# Altium PCB PCB3.PcbDoc (part 1 of 2)
Units mm, origin at the board's own origin, x right, y up, seen from the top; angles counter-clockwise.
Board outline 85.9 x 184.4 mm, 4 copper layers (Top Layer, GND, VCC, Bottom Layer), stack 1.615 mm thick; 137 components, 108 nets, 438 pads, 251 vias.
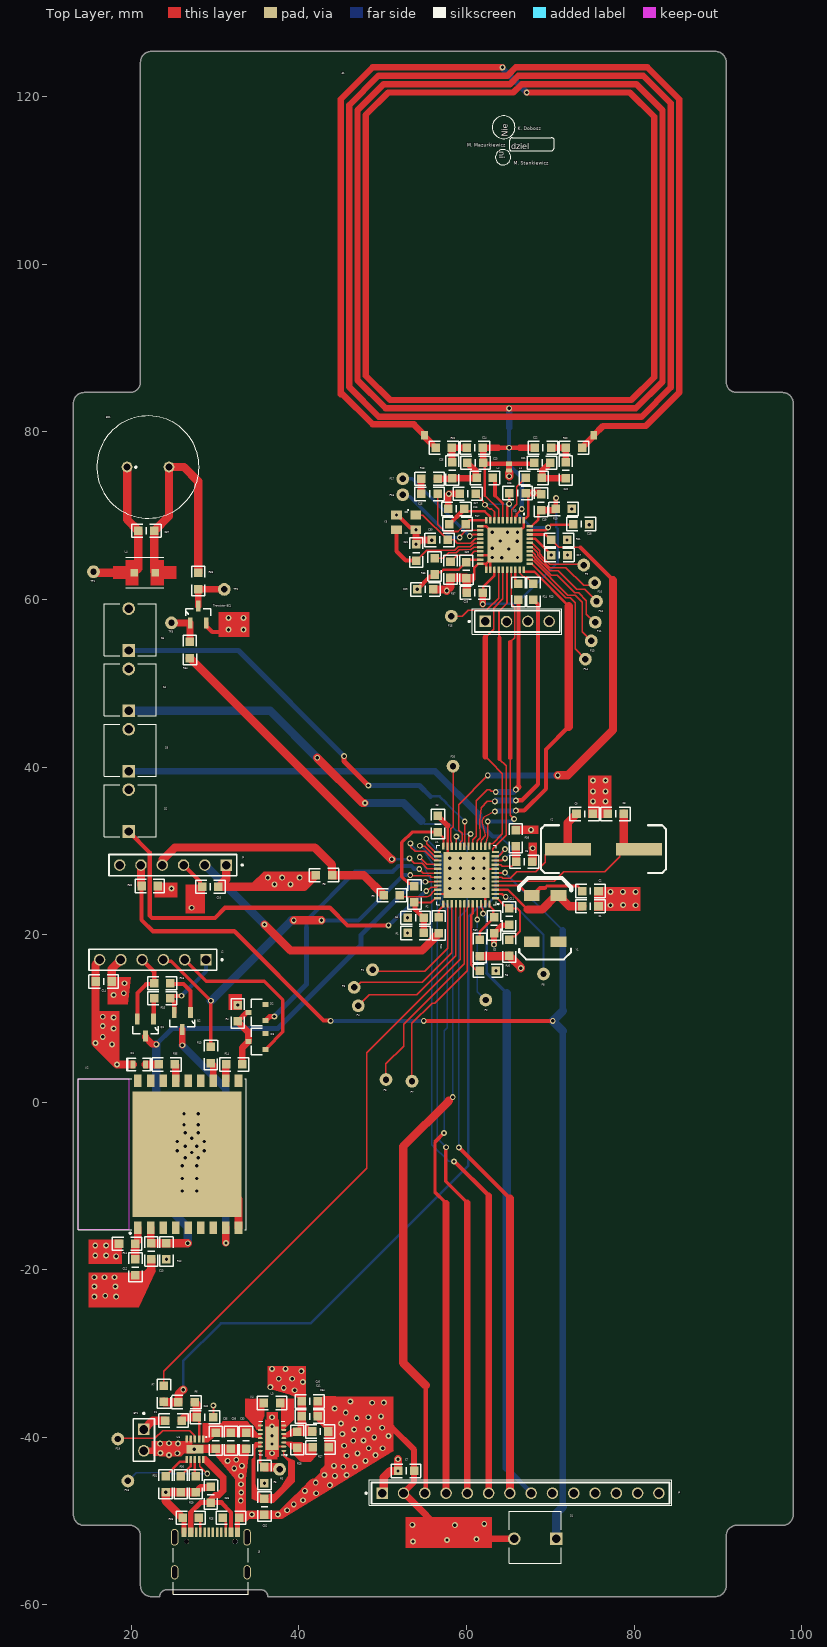
[diagram p0: Top Layer view]
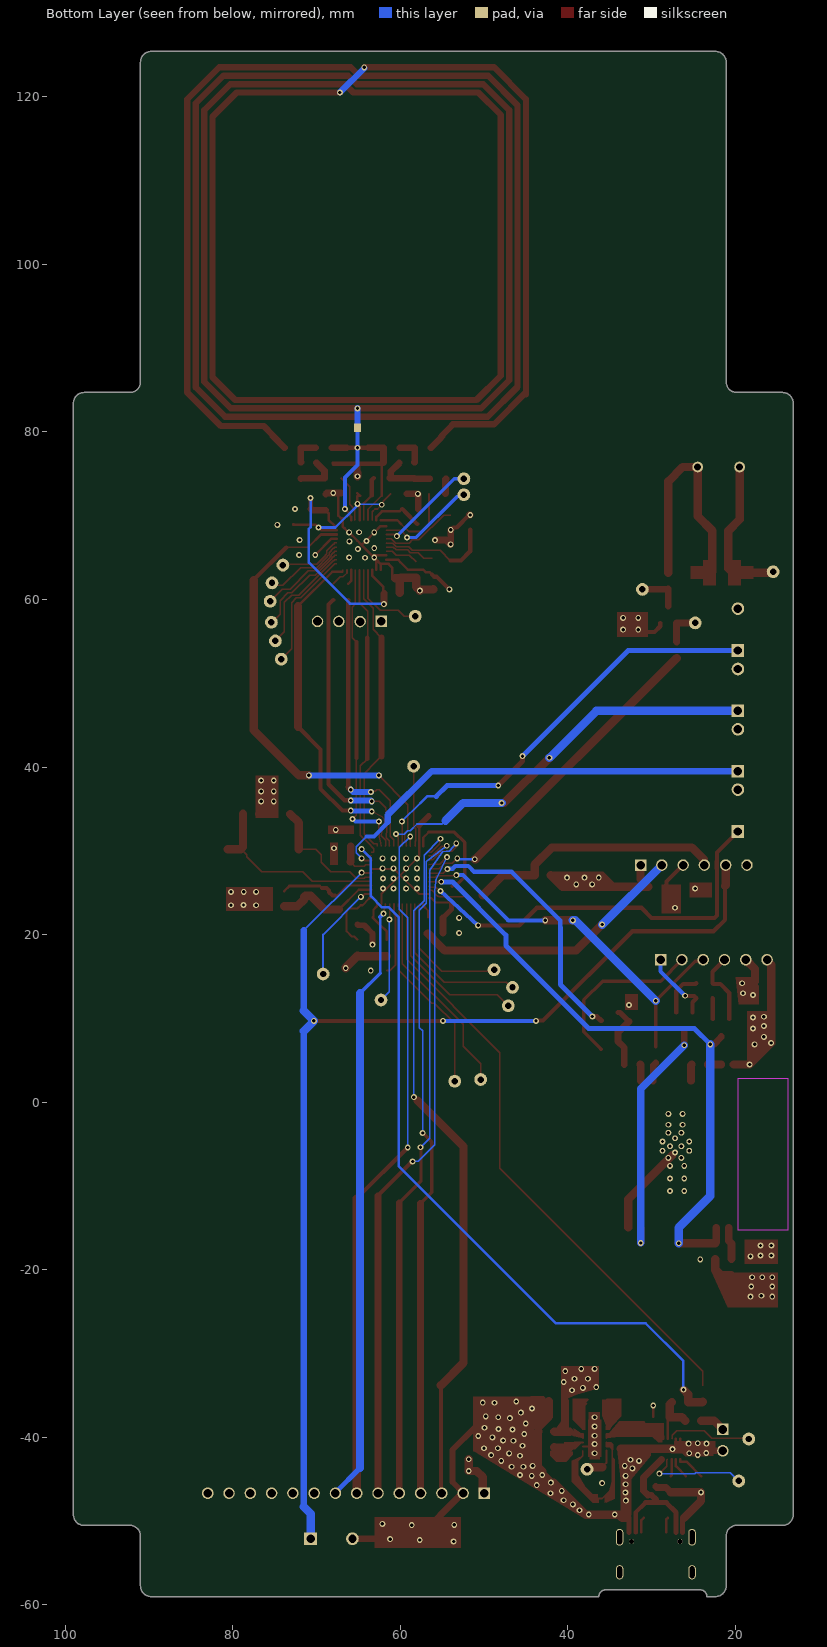
[diagram p1: Bottom Layer view, seen from below]
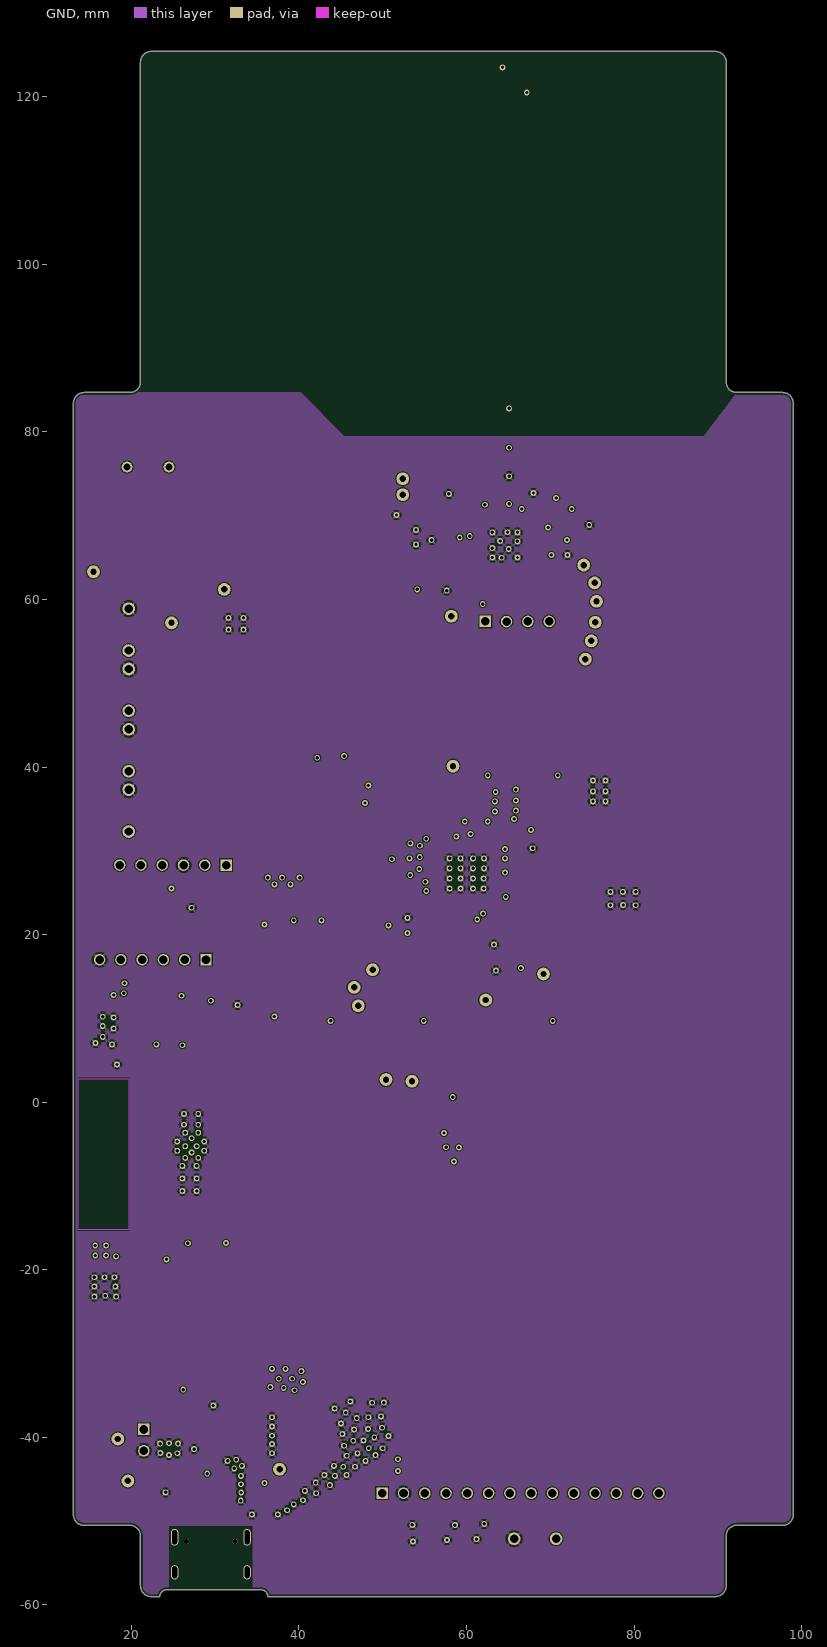
[diagram p2: GND]
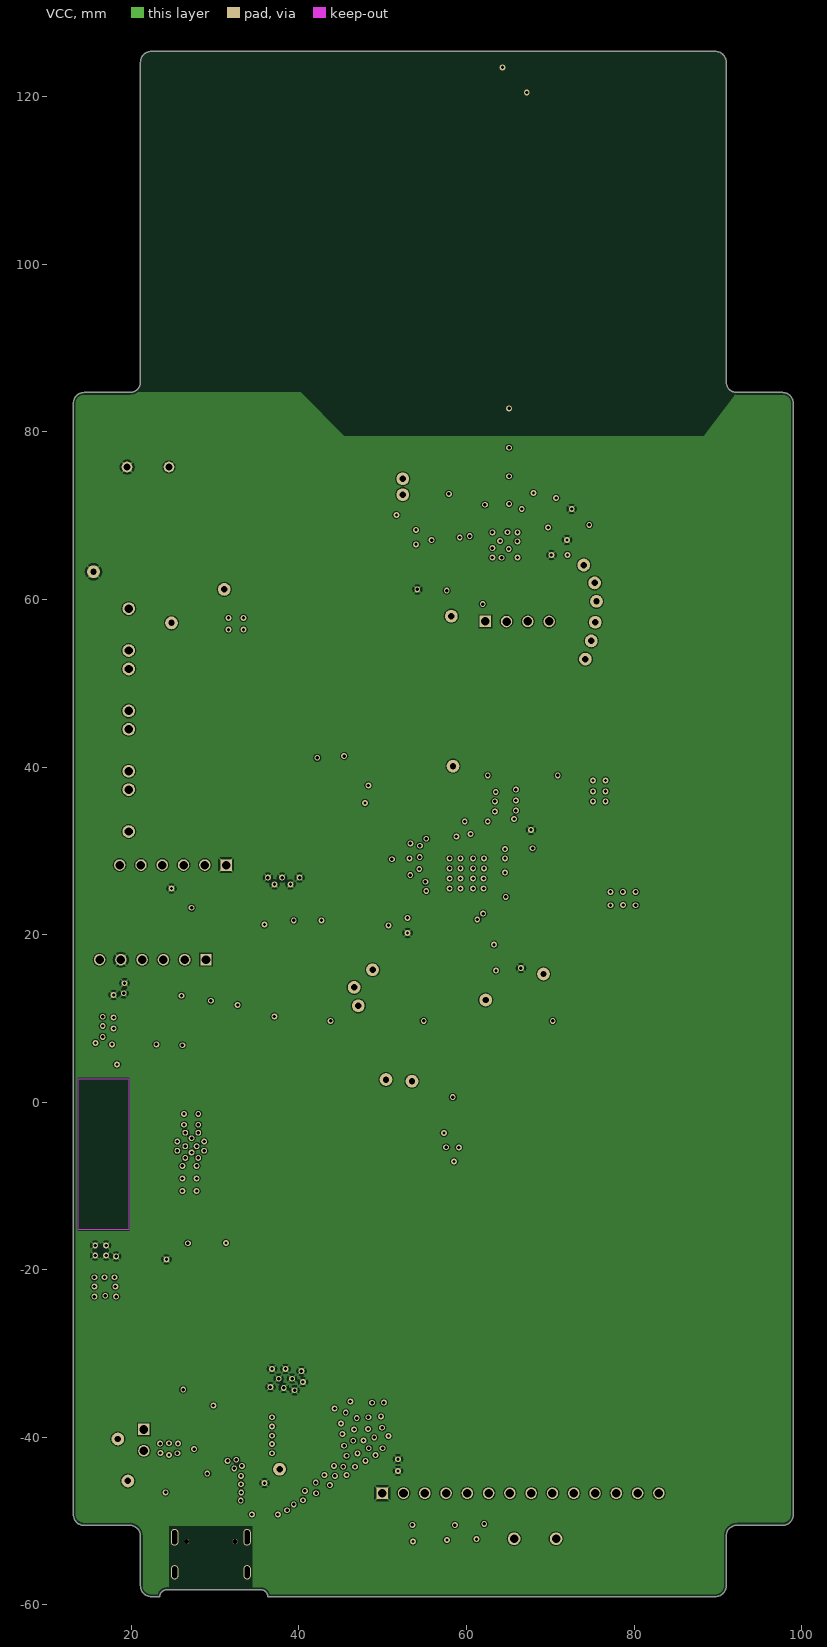
[diagram p3: VCC]
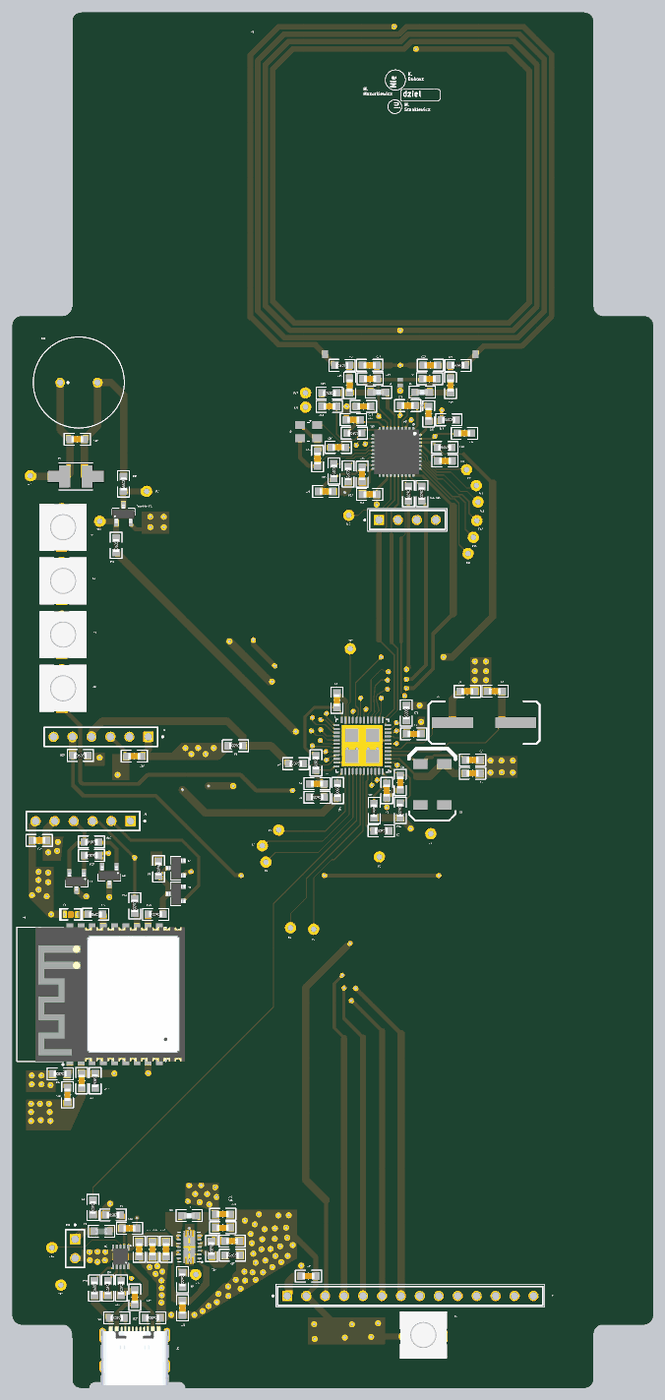
[diagram p5: 3D render of the assembled board from above, using the file's embedded part models]

## Layer stack, top to bottom
Top Solder: solder mask 0.0102, Solder Resist, Dk 3.5
Top Layer: signal copper 0.0175
Prepeg_Top1: prepreg 0.2, Dk 4.5
Prepeg_Top2: prepreg 0.2, Dk 4.5
GND: signal copper 0.035
Core Dielectric: core 0.71, FR4, Dk 4.8
VCC: signal copper 0.035
Prepeg_Bottom1: prepreg 0.2, Dk 4.5
Prepeg_Bottom2: prepreg 0.2, Dk 4.5
Bottom Layer: signal copper 0.0175
Bottom Solder: solder mask 0.0102, Solder Resist, Dk 3.5

## Board outline
13.1,-49.23 ccw(c14.37,-49.23) 14.37,-50.5 19.83,-50.5 cw(c19.83,-51.77) 21.1,-51.77 21.1,-57.73 ccw(c22.37,-57.73) 22.37,-59 23.4,-59 cw(c24.2,-59) 24.2,-58.2 35.5,-58.2 cw(c35.5,-59) 36.3,-59 89.73,-59 ccw(c89.73,-57.73) 91,-57.73 91,-51.77 cw(c92.27,-51.77) 92.27,-50.5 97.73,-50.5 ccw(c97.73,-49.23) 99,-49.23 99,83.43 ccw(c97.73,83.43) 97.73,84.7 92.27,84.7 cw(c92.27,85.97) 91,85.97 91,124.13 ccw(c89.73,124.13) 89.73,125.4 83.996,125.4 25,125.4 22.37,125.4 ccw(c22.37,124.13) 21.1,124.13 21.1,123 21.1,85.97 cw(c19.83,85.97) 19.83,84.7 14.37,84.7 ccw(c14.37,83.43) 13.1,83.43

## Design rules (kind name [scope] priority, off if disabled: settings)
BoardOutlineClearance [All] p1: gap=0.3 ignorepadtopadclearanceinfootprint=FALSE
Clearance [All] p1: gap=0.12 ignorepadtopadclearanceinfootprint=FALSE except(0: Track-Hole SMDPad-Hole THPad-Hole Via-Hole Fill-Hole Poly-Hole Region-Hole Text-Hole; 0.15: Arc-Arc Arc-Track Arc-SMDPad Arc-THPad Arc-Via Arc-Fill Arc-Poly Arc-Region Arc-Text Arc-Hole; 0.25: Track-Via Track-Fill Track-Poly Track-Region Track-Text)
ComponentClearance display_exeption [All vs InComponent('J4')] p1: gap=0 collisioncheckmode=3 verticalgap=0 showdistances=FALSE
ComponentClearance ComponentClearance_1 [All] p2: gap=0.254 collisioncheckmode=3 verticalgap=0.254 showdistances=FALSE
HoleSize [All] p1: absolutevalues=TRUE maxlimit=6 minlimit=0.3 maxpercent=80.000 minpercent=20.000
HoleToHoleClearance [All] p1: gap=0.52 allowstackedmicrovias=TRUE
MinimumAnnularRing [All] p1: minimumring=0.15
MinimumSolderMaskSliver [All] p1: minsoldermaskwidth=0.1
PlaneClearance [All] p1: clearance=0.25
PlaneConnect [All] p1: planeconnectstyle=Relief reliefexpansion=0.2 reliefentries=4 reliefconductorwidth=0.25 reliefairgap=0.2
PolygonConnect PolygonConnect_1 [IsPolygon vs IsVia] p1 off: connectstyle=Direct reliefconductorwidth=0.254 reliefentries=4 polygonreliefangle="90 Angle" airgapwidth=0.254
PolygonConnect [All] p2: connectstyle=Relief reliefconductorwidth=0.254 reliefentries=4 polygonreliefangle="45 Angle" airgapwidth=0.254
RoutingVias [All] p1: holewidth=0.35 width=0.75 viastyle="Through Hole" minholewidth=0.3 minwidth=0.7 maxholewidth=0.5 maxwidth=0.9
SilkToSilkClearance [All] p1: silktosilkclearance=0.12
SilkToSolderMaskClearance [IsPad] p1: minsilkscreentomaskgap=0.06 clearancetoexposedcopper=TRUE
SolderMaskExpansion [All] p1: expansion=0.05 istentingtop=FALSE
Width [All] p1: maxlimit=1.5 minlimit=0.12 preferedwidth=0.15
22 further rules are at their usual default settings.

## Classes and differential pairs
component class U_Zasilanie: BT1 C32 C33 C34 C35 C36 C38 C40 C41 C42 F1 J3 L3 P5 P18 P19 R5 R6 R7 R25 R26 R27 R28 R29 R30 R31 U4 U5
component class U_Wyswietlacz: C7 J4
component class U_STM-main: C1 C2 C3 C4 C5 C6 C8 C9 C10 C11 J1 P1 P2 P3 P4 P6 P7 P8 P20 R1 R2 R3 R8 R9 R10 R32 R38 R39 R40 U1 Y1 Y2
component class U_RFID: A1 C15 C16 C17 C18 C19 C20 C21 C22 C23 C24 C25 C26 C27 C28 C29 C30 C31 C39 L1 L2 P9 P10 P11 P12 P13 P14 P15 P16 P17 R17 R18 R19 R20 R21 R22 R23 R24 R36 R37 U3 Y3
component class U_ESP-WiFi: C12 C13 C14 D1 D2 D3 J2 Q1 Q2 R4 R11 R12 R13 R14 R15 R16 R35 U2
component class U_Buzzer: BZ1 C37 L4 R33 R34 TP1 TP2 TP3 "Transistor BC1"
component class U_Buttons: S1 S2 S3 S4 S5

## Components (designator, comment, footprint, x,y, rotation, side; value= is the part's Value field where it differs from the comment)
A1 "Antena" Antena_RFID 45,123.5 r270 top net-tie
BT1 "Bateria Li-Po" "LP623255 3,7V 1100mAh" 21.5,-40.3 r270 top net-tie
BZ1 "Buzzer" XDCR_PS1240P02BT 22,75.8 r0 top
C1 "20pF" 0603_CAP 74.8,23.4 r180 top
C2 "20pF" 0603_CAP 74.8,25.2 r180 top
C3 "100nF" 0603_CAP 56.6,33.2 r270 top
C4 "100nF" 0603_CAP 53.938,21.996 r0 top
C5 "100nF" 0603_CAP 63.3,21.1 r90 top
C6 "100nF" 0603_CAP 66.9,28.7 r180 top
C7 "100nF" 0603_CAP 52.8,-44 r180 top
C8 "32pF" 0603_CAP 77.8,34.4 r0 top
C9 "32pF" 0603_CAP 74.1,34.4 r180 top
C10 "100nF" 0603_CAP 29.438,25.696 r0 top
C11 "100nF" 0603_CAP 65.104,22.162 r90 top
C12 "100nF" 0603_CAP 20.5,-19.7 r90 top
C13 "100nF" 0603_CAP 22.4,-17.8 r90 top
C14 "100nF" 0603_CAP 16.7,14.4 r0 top
C15 "1nF" 0603_CAP 55.6,72.6 r180 top
C16 "100nF" 0603_CAP 58.8,70.8 r0 top
C17 "100nF" 0603_CAP 71.1,65.3 r180 top
C18 "100nF" 0603_CAP 73.7,69 r180 top
C19 "100nF" 0603_CAP 68.9,71.6 r270 top
C20 "22pF" 0603_CAP 71.838,75.4 r270 top
C21 "220pF" 0603_CAP 69.038,76.3 r0 top
C22 "200pF" 0603_CAP 69.138,78.1 r0 top
C23 "220pF" 0603_CAP 61.062,76.296 r0 top
C24 "200pF" 0603_CAP 61,78.1 r0 top
C25 "22pF" 0603_CAP 58.3,75.4 r270 top
C26 "100nF" 0603_CAP 66.1,72.704 r180 top
C27 "100nF" 0603_CAP 60.162,72.596 r0 top
C28 "100nF" 0603_CAP 61,60.8 r0 top
C29 "100nF" 0603_CAP 55.1,61.2 r180 top
C30 "16pF" 0603_CAP 56.8,67.1 r0 top
C31 "16pF" 0603_CAP 54,65.6 r270 top
C32 "100nF" 0603_CAP 35.904,-48.262 r90 top
C33 "10uF" 0603_CAP 33.7,-40.4 r90 top
C34 "22uF" 0603_CAP 42.562,-39.296 r180 top
C35 "100nF" 0603_CAP 30.1,-40.4 r90 top
C36 "100nF" 0603_CAP 29.496,-46.838 r270 top
C37 "1000nF" 0603_CAP 21.8,68.2 r180 top
C38 "10uF" 0603_CAP 31.9,-40.4 r90 top
C39 "100nF" 0603_CAP 60,63.5 r90 top
C40 "22uF" 0603_CAP 41.3,-35.7 r180 top
C41 "22uF" 0603_CAP 41.3,-37.5 r180 top
C42 "100nF" 0603_CAP 28.8,-37.6 r180 top
D1 "Value" 0603_LED_R_Reflow 20.95,4.5 r180 top
D2 "Value" SOT23-R 35,10.7 r90 top
D3 "Value" SOT23-R 35,7.25 r90 top
F1 "Bezpiecznik" 0603_FUSE 25.038,-38 r0 top
J1 "Pin Header STM" SAMTEC_TSW-112-16-T-S-06 17.35,28.3 r180 top
J2 "Pin Header ESP" SAMTEC_TSW-112-16-T-S-06 14.95,17 r180 top
J3 "Złącze USB-C" HRO_TYPE-C-31-M-12 29.5,-56.1 r0 top
J4 "Wyswietlacz" pin_header_LCD 35.19,-48.665 r0 top
L1 "560nH" 0603_IND 68.038,74.5 r0 top
L2 "560nH" 0603_IND 62.2,74.5 r180 top
L3 "1,5uH" 0603_IND 36.8,-35.9 r0 top
L4 "1500uH" IND_LQH43MN152K03L 21.6,63.2 r180 top
P1 "Pad" pad#1 48.8,15.8 r90 top
P2 "Pad" pad#1 62.3,12.2 r90 top
P3 "Pad" pad#1 46.6,13.7 r90 top
P4 "Pad" pad#1 47.1,11.5 r90 top
P5 "Pad" pad#1 37.7,-43.8 r270 top
P6 "Pad" pad#1 50.4,2.7 r90 top
P7 "Pad" pad#1 53.5,2.5 r90 top
P8 "Pad" pad#1 69.2,15.3 r90 top
P9 "Pad" pad#1 74,64.1 r90 top
P10 "Pad" pad#1 75.3,61.975 r180 top
P11 "Pad" pad#1 75.375,57.275 r90 top
P12 "Pad" pad#1 75.525,59.775 r180 top
P13 "Pad" pad#2 74.9,45.05 r180 top
P14 "Pad" pad#3 71.2,42.875 r180 top
P15 "Pad" pad#4 68.2,58 r180 top
P16 "Pad" pad#1 52.4,72.5 r180 top
P17 "Pad" pad#1 52.4,74.4 r180 top
P18 "Pad" pad#1 19.6,-45.2 r0 top
P19 "Pad" pad#1 18.4,-40.2 r0 top
P20 "Pad" pad#1 58.4,40.1 r180 top
Q1 "NPN" SOT95P240X110-3N 21.7,8.9 r270 top
Q2 "NPN" SOT95P240X110-3N 26.1,9.7 r270 top
R1 "0R" 0603_RES 53.938,20.2 r180 top
R2 "10R" 0603_RES 53.8,24.8 r270 top
R3 "0R" 0603_RES 62.562,15.7 r180 top
R4 "100k" 0603_RES 32.7,10.6 r270 top
R5 "10k" 0603_RES 35.9,-44.5 r270 top
R6 "100k" 0603_RES 26.6,-35.8 r0 top
R7 "100k" 0603_RES 23.9,-34.8 r270 top
R8 "10k" 0603_RES 43,27.1 r180 top
R9 "100R" 0603_RES 51.1,24.7 r180 top
R10 "100R" 0603_RES 56.7,21.1 r270 top
R11 "0R" 0603_RES 19.5,-16.9 r180 top
R12 "10k" 0603_RES 24.2,-17.8 r270 top
R13 "100R" 0603_RES 29.5,5.638 r270 top
R14 "100R" 0603_RES 32.3,4.5 r180 top
R15 "10k" 0603_RES 23.7,12.4 r180 top
R16 "10k" 0603_RES 23.7,14.2 r0 top
R17 "1k" 0603_RES 58.938,69 r0 top
R18 "2k7" 0603_RES 55.6,74.4 r0 top
R19 "0R" 0603_RES 71.6,70.8 r0 top
R20 "10R" 0603_RES 72.838,78.1 r180 top
R21 "10k" 0603_RES 71.062,67.1 r0 top
R22 "10R" 0603_RES 57.3,78.1 r0 top
R23 "100R" 0603_RES 68,60.9 r270 top
R24 "100R" 0603_RES 66.2,60.9 r270 top
R25 "5k1" 0603_RES 31.9,-49.6 r180 top
R26 "5k1" 0603_RES 27.1,-49.6 r180 top
R27 "100k" 0603_RES 42.6,-41.2 r0 top
R28 "560k" 0603_RES 39.8,-40.3 r270 top
R29 "2k4" 0603_RES 27.7,-45.6 r270 top
R30 "25k" 0603_RES 25.9,-45.6 r270 top
R31 "10k" 0603_RES 24.1,-45.6 r90 top
R32 "10k" 0603_RES 22.2,25.8 r0 top
R33 "Resistance" 0603_RES 28,62.2 r90 top
R34 "Resistance" 0603_RES 27,53.962 r90 top
R35 "100R" 0603_RES 24.238,4.5 r0 top
R36 "0R" 0603_RES 56.2,63.938 r90 top
R37 "0R" 0603_RES 58.1,63.538 r90 top
R38 "0R" 0603_RES 65.9,31.5 r90 top
R39 "0R" 0603_RES 61.6,18.4 r270 top
R40 "0R" 0603_RES 65.1,18.438 r270 top
S1 "RSTButton" SW_TL59NF160Q 68.2,-52.1 r180 top
S2 "Button1" SW_TL59NF160Q 19.7,34.8 r90 top
S3 "Button2" SW_TL59NF160Q 19.7,42 r90 top
S4 "Button3" SW_TL59NF160Q 19.7,49.2 r90 top
S5 "Button4" SW_TL59NF160Q 19.7,56.4 r90 top
TP1 "Test Point" pad#1 15.5,63.3 r0 top
TP2 "Test Point" pad#1 31.1,61.2 r90 top
TP3 "Test Point" pad#1 24.8,57.2 r90 top
"Transistor BC1" "NPN" SOT95P240X110-3N 28,58.2 r90 top
U1 "STM32L451CEU6" QFN50P700X700X60-49N 60,27.1 r180 top
U2 "ESP32-C3-WROOM-02-H4" MODULE_ESP32-C3-WROOM-02-H4 25.725,-6.235 r90 top
U3 "PN532" QFN40G-0.5-6X6MM 64.6,66.5 r270 top
U4 "TPS63020" IC_TPS63020DSJT 36.8,-40.1 r180 top
U5 "BQ25185" SON50P250X250X80-11N 27.6,-41.4 r270 top
Y1 "32,768kHz" "Q 0,032768-SMQ32SL-12,5-20-T1-LF" 69.4,21.9 r270 top
Y2 "8MHz" ATS080BSM-1E 76.35,30.2 r180 top
Y3 "27,12MHz" XTAL_ABM8-27.120MHZ-10-D1G-T 52.8,69.2 r270 top
? "GND-TVSS" GND-TVSS 65.1,75.8 r270 top net-tie

## Footprints (in the part's own frame and the unit in brackets; to place one, negate y for a bottom-side part, rotate by r counter-clockwise, add the part's x,y. Pads: shape width x height; smd on the part's side, far side on the other; paste and mask are expansions set on the pad)
0603_CAP [mil]
  rect 40x40 smd: 1(-37.89,0.14) 2(37.89,0.14)
  silkscreen extent -69,-31 69,32, body extent -31,-16 32,16, height 28
0603_FUSE [mil]
  rect 40x40 smd: 1(-37.89,0) 2(37.89,0)
  silkscreen extent -69,-31 69,31, body extent -31,-15 32,15, height 30
0603_IND [mil]
  rect 40x40 smd: 1(-37.89,0) 2(37.89,0)
  silkscreen extent -69,-31 69,31, body extent -31,-16 32,16, height 39
0603_LED_R_Reflow [mm]
  rect 0.6x0.9 smd paste-0.05: 1(-0.75,0) 2(0.75,0)
  silkscreen extent -1.35,-0.75 1.5,0.76, body extent -0.85,-0.45 0.85,0.45, height 0.9
0603_RES [mil]
  rect 40x40 smd: 1(-37.89,0) 2(37.89,0)
  silkscreen extent -69,-31 69,31, body extent -33,-17 33,15, height 22
Antena_RFID [mm]
  rect 1x0.8 smd: 1(43.9,30.2) 3(43.9,10)
  rect 1x0.8 smd far side: 2(43,20.1)
  Top Layer lines w0.75: 39,0 3.8,0 0,3.8 0,19.3 ; 38.8,0 42.6,3.8 42.6,8.7 cw(c42.7,8.7) 42.7,8.8 43.9,10 ; 3,22.2 3,34.5 5.9,37.4 36.975,37.4 39.7,34.675 39.7,30.8 39.7,9.6 39.7,5.9 36.8,3 5.675,3 3,5.675 3,20.6 2,21.6 2,21.9 2,35.3 5.1,38.4 37.525,38.4 40.7,35.225 40.7,5.8 40.7,5.35 37.35,2 5.1,2 2,5.1 2,19.5 2,19.9 2,20.2 1,21.2 1,23.1 1,36.1 4.3,39.4 38.2,39.4 41.7,35.9 41.7,4.55 38.15,1 5.1,1 4.5,1 1,4.5 1,17.6 1,19.9 0,20.9 0,22.7 0,36.6 3.8,40.4 38.8,40.4 42.8,36.4 42.8,31.3 43.9,30.2
  Bottom Layer lines w0.254: 0.1,19.3 0,19.3
  Bottom Layer lines w0.75: 0.1,19.3 3,22.2 ; 43,20.1 40.7,20.1
ATS080BSM-1E [mm]
  rect 5.5x1.5 smd: 1(-4.25,0) 2(4.25,0)
  silkscreen extent -7.45,-2.85 7.45,2.85, body extent -6.15,-2.41 6.15,2.42, height 4.3
GND-TVSS [mm]
  rect 0.5x0.7 smd mask-1: 1(-0.4,0) 2(0.4,0)
  Top Layer lines w0.7: 0.2,0 -0.2,0
HRO_TYPE-C-31-M-12 [mm]
  rect 0.6x1.14 smd mask+0.05: A1_B12(-3.2,4.75) A4_B9(-2.4,4.75) B1_A12(3.2,4.75) B4_A9(2.4,4.75)
  rect 0.3x1.14 smd mask+0.05: A5(-1.25,4.75) A6(-0.25,4.75) A7(0.25,4.75) A8(1.25,4.75) B5(1.75,4.75) B6(0.75,4.75) B7(-0.75,4.75) B8(-1.75,4.75)
  oval 0.9x2 hole 0.6 slot 1.7 at 90 deg: S1(-4.325,4.17) S2(4.325,4.17)
  oval 0.9x1.7 hole 0.6 slot 1.4 at 90 deg: S3(-4.325,0) S4(4.325,0)
  round 0.6 hole 0.6 unplated: ""(-2.89,3.68) ""(2.89,3.68)
  silkscreen extent -4.47,-2.6 4.47,2.85, body extent -4.47,-2.6 4.47,5.31, height 3.31
IC_TPS63020DSJT [mm]
  oval 0.6x0.24 smd mask+0: 1(-1.4,1.5) 2(-1.4,1) 3(-1.4,0.5) 4(-1.4,0) 5(-1.4,-0.5) 6(-1.4,-1) 7(-1.4,-1.5) 8(1.4,-1.5) 9(1.4,-1) 10(1.4,-0.5) 11(1.4,0) 12(1.4,0.5) 13(1.4,1) 14(1.4,1.5)
  rect 1.5x2.8 smd paste-2 mask+0: 15(0,0)
  Top Layer region: 0.79,-2.2 0.59,-2.2 0.59,-1.425 0.33,-1.425 0.33,-2.2 0.13,-2.2 0.13,-1.425 -0.13,-1.425 -0.13,-2.2 -0.33,-2.2 -0.33,-1.425 -0.59,-1.425 -0.59,-2.2 -0.79,-2.2 -0.79,2.2 -0.59,2.2 -0.59,1.425 -0.33,1.425 -0.33,2.2 -0.13,2.2 -0.13,1.425 0.13,1.425 0.13,2.2 0.33,2.2 0.33,1.425 0.59,1.425 0.59,2.2 0.79,2.2
  silkscreen extent -1.78,-2 1.5,2.07
IND_LQH43MN152K03L [mm]
  rect 0.9x0.9 smd paste-1 mask+0: 1(-1.25,0) 2(1.25,0)
  Top Layer region: -0.75,-1.5 -2.25,-1.5 -2.25,-0.75 -3.75,-0.75 -3.75,0.75 -2.25,0.75 -2.25,1.5 -0.75,1.5
  Top Layer region: 2.25,0.75 3.75,0.75 3.75,-0.75 2.25,-0.75 2.25,-1.5 0.75,-1.5 0.75,1.5 2.25,1.5
  silkscreen extent -2.25,-1.82 2.25,1.82
"LP623255 3,7V 1100mAh" [mm]
  rect 1.37x1.37 hole 1.02: 1(-1.24,0)
  round 1.37 hole 1.02: 2(1.3,0)
  silkscreen extent -3.26,-1.27 2.57,1.27
MODULE_ESP32-C3-WROOM-02-H4 [mm]
  rect 1.5x0.9 smd: 1(-8.725,4.925) 2(-8.725,3.425) 3(-8.725,1.925) 4(-8.725,0.425) 5(-8.725,-1.075) 6(-8.725,-2.575) 7(-8.725,-4.075) 8(-8.725,-5.575) 9(-8.725,-7.075) 10(8.775,-7.075) 11(8.775,-5.575) 12(8.775,-4.075) 13(8.775,-2.575) 14(8.775,-1.075) 15(8.775,0.425) 16(8.775,1.925) 17(8.775,3.425) 18(8.775,4.925)
  rect 15x13 smd: 19(0.025,-0.95)
  round 0.7 hole 0.4 mask+0: 28(0.435,0.225) 29(1.535,0.225) 30(-0.415,-0.725) 31(0.985,-0.725) 32(2.585,-0.725) 33(0.235,-1.475) 34(1.935,-1.475) 35(-0.415,-2.275) 36(0.985,-2.075) 37(2.585,-2.275) 38(0.435,-2.975) 39(1.535,-2.975)
  Keep-Out Layer region: 9.025,6.025 -8.975,6.025 -8.975,12.025 9.025,12.025
  Keep-Out Layer region: 9.025,6.025 -8.975,6.025 -8.975,12.025 9.025,12.025
  silkscreen extent -9.5,-7.98 9.03,12.03, body extent -8.97,-10.48 9.03,9.53, height 3.35
pad#1 [mil]
  round 60 hole 30: 1(0,0)
pad#2 [mil]
  round 60 hole 30: 1(0,-393.7)
pad#3 [mil]
  round 60 hole 30: 1(-118.11,-393.7)
pad#4 [mil]
  round 60 hole 30: 1(393.7,0)
pin_header_LCD [mm]
  rect 1.37x1.37 hole 1.02: 1(14.76,2) 15(27.06,106.04)
  round 1.37 hole 1.02: 2(17.3,2) 3(19.84,2) 4(22.38,2) 5(24.92,2) 6(27.46,2) 7(30,2) 8(32.54,2) 9(35.08,2) 10(37.62,2) 11(40.16,2) 12(42.7,2) 13(45.24,2) 14(47.78,2) 16(29.6,106.025) 17(32.14,106.04) 18(34.68,106.04)
  silkscreen extent 12.74,0.73 49.05,107.31
"Q 0,032768-SMQ32SL-12,5-20-T1-LF" [mm]
  rect 1.3x1.9 smd: 1(-2.75,1.6) 2(2.75,1.6) 3(2.75,-1.6) 4(-2.75,-1.6)
  silkscreen extent -4.85,-3.13 4.85,3.1, body extent -4,-2 4,2, height 2.4
QFN40G-0.5-6X6MM [mm]
  rrect50% 0.8x0.3 smd: 1(-2.95,2.25) 2(-2.95,1.75) 3(-2.95,1.25) 4(-2.95,0.75) 5(-2.95,0.25) 6(-2.95,-0.25) 7(-2.95,-0.75) 8(-2.95,-1.25) 9(-2.95,-1.75) 10(-2.95,-2.25) 21(2.95,-2.25) 22(2.95,-1.75) 23(2.95,-1.25) 24(2.95,-0.75) 25(2.95,-0.25) 26(2.95,0.25) 27(2.95,0.75) 28(2.95,1.25) 29(2.95,1.75) 30(2.95,2.25)
  rrect50% 0.3x0.8 smd: 11(-2.25,-2.95) 12(-1.75,-2.95) 13(-1.25,-2.95) 14(-0.75,-2.95) 15(-0.25,-2.95) 16(0.25,-2.95) 17(0.75,-2.95) 18(1.25,-2.95) 19(1.75,-2.95) 20(2.25,-2.95) 31(2.25,2.95) 32(1.75,2.95) 33(1.25,2.95) 34(0.75,2.95) 35(0.25,2.95) 36(-0.25,2.95) 37(-0.75,2.95) 38(-1.25,2.95) 39(-1.75,2.95) 40(-2.25,2.95)
  rrect10% 4.2x4.2 smd: 41(0,0)
  silkscreen extent -3.78,2.19 -3.58,2.39, body extent -3,-3 3,3, height 1
QFN50P700X700X60-49N [mm]
  rrect25% 0.83x0.27 smd: 1(-3.45,2.75) 12(-3.45,-2.75) 25(3.45,-2.75) 36(3.45,2.75)
  rrect25% 0.87x0.27 smd: 2(-3.43,2.25) 3(-3.43,1.75) 4(-3.43,1.25) 5(-3.43,0.75) 6(-3.43,0.25) 7(-3.43,-0.25) 8(-3.43,-0.75) 9(-3.43,-1.25) 10(-3.43,-1.75) 11(-3.43,-2.25) 26(3.43,-2.25) 27(3.43,-1.75) 28(3.43,-1.25) 29(3.43,-0.75) 30(3.43,-0.25) 31(3.43,0.25) 32(3.43,0.75) 33(3.43,1.25) 34(3.43,1.75) 35(3.43,2.25)
  rrect25% 0.27x0.83 smd: 13(-2.75,-3.45) 24(2.75,-3.45) 37(2.75,3.45) 48(-2.75,3.45)
  rrect25% 0.27x0.87 smd: 14(-2.25,-3.43) 15(-1.75,-3.43) 16(-1.25,-3.43) 17(-0.75,-3.43) 18(-0.25,-3.43) 19(0.25,-3.43) 20(0.75,-3.43) 21(1.25,-3.43) 22(1.75,-3.43) 23(2.25,-3.43) 38(2.25,3.43) 39(1.75,3.43) 40(1.25,3.43) 41(0.75,3.43) 42(0.25,3.43) 43(-0.25,3.43) 44(-0.75,3.43) 45(-1.25,3.43) 46(-1.75,3.43) 47(-2.25,3.43)
  rect 5.5x5.5 smd paste-4: 49(0,0)
  silkscreen extent -3.85,-3.55 3.55,3.55
SAMTEC_TSW-112-16-T-S-06 [mm]
  rect 1.37x1.37 hole 1.02: 1(-13.97,0)
  round 1.37 hole 1.02: 2(-11.43,0) 3(-8.89,0) 4(-6.35,0) 5(-3.81,0) 6(-1.27,0)
  silkscreen extent -15.99,-1.27 0,1.27
SON50P250X250X80-11N [mm]
  rect 0.85x0.3 smd mask+0.05: 1(-1.225,1) 2(-1.225,0.5) 3(-1.225,0) 4(-1.225,-0.5) 5(-1.225,-1) 6(1.225,-1) 7(1.225,-0.5) 8(1.225,0) 9(1.225,0.5) 10(1.225,1)
  rect 1x2 smd paste-2 mask+0.05: 11(0,0)
  silkscreen extent -1.47,1.33 -1.43,1.37, body extent -1,-1.1 1,1.1, height 0.8
SOT23-R [mm]
  rect 0.6x0.7 smd: 1(-0.95,-1) 2(0.95,-1) 3(0,1)
  silkscreen extent -1.57,-0.65 1.57,0.66, body extent -1.52,-1.3 1.53,1.3, height 1.3
SOT95P240X110-3N [mil]
  rect 52x22 smd: 1(-40,38) 2(-40,-38) 3(40,0)
  silkscreen extent -6,-59 28,59, body extent -48,-59 48,59, height 44
SW_TL59NF160Q [mm]
  rect 1.508x1.508 / inner round 1.508 / far side rect 1.508x1.508 hole 1: 1(-2.5,0)
  round 1.508 hole 1: 2(2.5,0)
  silkscreen extent -3.1,-3.3 3.1,2.9, body extent -3.1,-3.3 3.1,2.9, height 4.3
XDCR_PS1240P02BT [mm]
  round 1.28 hole 0.85: 1(-2.5,0) 2(2.5,0)
  silkscreen extent -6.1,-6.1 6.1,6.1
XTAL_ABM8-27.120MHZ-10-D1G-T [mm]
  rect 1.05x1.3 smd: 1(-0.875,1.15) 2(-0.875,-1.15) 3(0.875,-1.15) 4(0.875,1.15)
  silkscreen extent -1.49,-0.18 1.25,0.27

## Part data
C1 C2 C3 C4 C5 C6 C7 C8 C9 C10 C11 C12 C13 C14 C15 C16 C17 C18 C19 C20 C21 C22 C23 C24 C25 C26 C27 C28 C29 C30 C31 C32 C33 C34 C35 C36 C37 C38 C39 C40 C41 C42: library part Cap, "Ceramic capacitor"
D1: library part LED_R_small
D2 D3: library part "D Schottky", "Schottky Diode"
J3: library part "Zlacze USB-C"
J4: library part "Pin Header Wyswietlacz"
L1 L2 L3 L4: library part Inductor, "Inductor"
Q1 Q2 "Transistor BC1": "NPN General-purpose Transistor"
R1 R2 R3 R4 R5 R6 R7 R8 R9 R10 R11 R12 R13 R14 R15 R16 R17 R18 R19 R20 R21 R22 R23 R24 R25 R26 R27 R28 R29 R30 R31 R32 R35 R36 R37 R38 R39 R40: library part RES, "Resistor"
R33: library part RES, "Resistor", Resistance=100R
R34: library part RES, "Resistor", Resistance=6k8
S1 S2 S3 S4 S5: library part Button
U2: "WiFi Modules (802.11) (Engineering Samples) SMD module, ESP32-C3, 4MB SPI flash, PCB antenna, -40 C +105 C", Package=Package, Availability="In Stock", Check_prices=https://www.snapeda.com/parts/ESP32-C3-WROOM-02-H4/Espressif+Systems/view-part/?ref=eda, MF="Espressif Systems", MP=ESP32-C3-WROOM-02-H4, Price=None, Purchase-URL=https://pricing.snapeda.com/search/part/ESP32-C3-WROOM-02-H4/?ref=eda, SnapEDA_Link=https://www.snapeda.com/parts/ESP32-C3-WROOM-02-H4/Espressif+Systems/view-part/?ref=snap
U4: library part "Stabilizator napięcia"
Y1: library part Oscylator4, PartNumber="Q 0,032768-SMQ32SL-12,5-20-T1-LF"
Y2: library part Oscylator, PartNumber=ATS080BSM-1E
Y3: library part Oscylator4, PartNumber=ABM8-27.120MHZ-10-D1G-T

## Via types
v1: diameter 0.7, hole 0.4, Top Layer to Bottom Layer, 186 vias
v2: diameter 0.7, hole 0.4, Top Layer to Bottom Layer, tented bottom, 64 vias
v3: diameter 0.7, hole 0.4, Top Layer to Bottom Layer, tented both sides, 1 vias

## Nets (pads, with @x,y where several pads share a name; then routed paths per layer and width w, separated by ;. In a path a pad name is that pad's centre, name@x,y a point inside that pad or via, vN(x,y) a via of type N, cw(c..) or ccw(c..) an arc to the next point about the centre after c; other vN are vias at no path point)
EN: C13.2 Q1.3 R12.1 U1.32 U2.2 | length 75.7
  Top Layer w0.15: v1(55.1,26.3) 55.125,26.325 56.545,26.325 U1.32@56.57,26.35
  Top Layer w0.8: Q1.3@21.7,7.884 21.7,7.744 22.544,6.9 v1(23,6.9)
  Top Layer w0.9: U2.2@22.3,-14.96 22.3,-16.741 C13.2@22.396,-16.838
  Top Layer w1: C13.2@22.396,-16.838 R12.1@24.2,-16.838 v1(26.762,-16.838)
  Bottom Layer w0.6: v1(23,6.9) 24.9,8.8 37.5,8.8 47.4,18.7 47.4,19.927 53.773,26.3 v1(55.1,26.3)
  Bottom Layer w1: v1(23,6.9) 23,-11.2 26.762,-14.962 v1(26.762,-16.838)
GND: "Transistor BC1.2" ?.2 BT1.2 C1.1 C2.1 C3.1 C4.1 C5.1 C6.1 C7.1 C8.1 C9.1 C10.1 C11.1 C12.1 C13.1 C14.1 C16.1 C17.1 C18.1 C19.1 C26.1 C27.1 C28.1 C29.1 C30.1 C31.1 C32.1 C33.1 C34.1 C35.1 C36.1 C38.1 C39.1 C40.1 C41.1 C42.1 D1.2 J1.3 J2.6 J3.A1_B12 J3.B1_A12 J4.2 R3.1 R4.1 R25.1 R26.2 R27.2 R29.2 R30.2 R31.1 R37.1 S1.2 S2.2 S3.2 S4.2 S5.2 U1.8 U1.23 U1.35 U1.47 U1.49 U2.9 U2.19 U2.28 U2.29 U2.30 U2.31 U2.32 U2.33 U2.34 U2.35 U2.36 U2.37 U2.38 U2.39 U3.1 U3.11 U3.18 U3.20 U3.21 U3.22 U3.41 U4.2 U4.15 U5.4 U5.5 U5.11 Y3.2 Y3.4 | length 194.1
  Top Layer w0.15: C42.1@29.762,-37.604 C42.1@29.8,-37.566
  Top Layer w0.25: C42.1@29.8,-37.566 v2(29.8,-36.2) ; v2(36.8,-39.8) U4.15@36.8,-40.1 v2(36.8,-40.8) 36.8,-40.9 37,-41.1 U4.2@38.2,-41.1 ; v2(36.8,-38.7) v2(36.8,-37.6) ; U1.35@56.57,24.85 57.75,24.85 U1.49@60,27.1 ; U1.49@57.75,29.35 U1.49@60,27.1 ; U1.47@62.25,23.67 62.25,24.85 U1.49@60,27.1 ; U1.8@63.43,27.85 60.75,27.85 U1.49@60,27.1
  Top Layer w0.3: U5.5@26.6,-40.175 26.6,-40.7 26.75,-40.85 26.75,-40.95 27.2,-41.4 v2(27.5,-41.4) ; U5.4@27.1,-40.175 27.1,-40.95 U5.11@27.525,-41.375 ; U1.49@57.75,29.35 U1.23@57.75,30.53 57.75,33.016 ; 60.962,62.538 60.962,63.803 U3.20@61.4,64.241 ; U3.20@61.4,64.25 U3.20@61.65,64.25 62.35,64.25 ; U3.18@61.65,65.25 U3.41@63.35,65.25 ; U3.11@61.65,68.75 62.35,68.75 v2(63.1,68) 63.1,67.975 64.05,67.025 U3.41@64.05,67 ; U3.21@62.35,63.55 62.35,64.25 ; U3.22@62.85,63.55 U3.41@62.85,64.75 ; v2(64.025,66.975) U3.41@64.05,67 ; C26.1@67.062,72.7 67.4,72.362 67.4,70 67.1,69.7 66.85,69.7 U3.1@66.85,69.45 66.85,68.659 66.674,68.484 66.616,68.484 66.132,68 v2(66.1,68) 65.1,67 U3.41@64.6,66.5 ; 62.35,64.25 U3.41@62.85,64.75 ; U3.41@62.85,64.75 v2(63.1,65) U3.41@63.35,65.25 ; U3.41@63.35,65.25 U3.41@64.6,66.5 ; U3.41@64.05,67 64.1,67 U3.41@64.6,66.5
  Top Layer w0.5: J1.3@26.24,28.3 28.217,26.323 28.217,25.958 C10.1@28.475,25.7 ; 28.965,57.184 28.965,56.803 29.668,56.1 30.5,56.1 ; Y3.2@51.775,70.075 53.25,68.6 53.675,68.6 Y3.4@53.95,68.325
  Top Layer w0.6: R26.2@26.138,-49.6 26.3,-49.762 J3.A1_B12@26.3,-51.35 ; J3.B1_A12@32.7,-51.35 32.7,-49.762 R25.1@32.862,-49.6 32.87,-49.592 32.953,-49.51 32.953,-47.672 33.125,-47.5 v1(33.125,-46.575) 33.1,-46.55 v1(33.1,-45.6) 33.081,-45.581 33.081,-44.619 v1(33.1,-44.6)
  Top Layer w0.7: S3.2@19.596,44.604 S3.2@19.7,44.5 ; v1(49.8,-37.5) 49.8,-37.693 50.95,-38.843 51.11,-38.843 53.762,-41.495 C7.1@53.762,-44.004 53.762,-45.338 J4.2@52.5,-46.6 ; C3.1@56.604,34.162 57.75,33.016 ; v1(63.3,18.8) 63.296,18.804 C5.1@63.296,20.138 64.281,21.123 65.023,21.123 C11.1@65.1,21.2 ; C6.1@67.862,28.696 67.862,30.262 v1(67.9,30.3)
  Top Layer w0.8: BT1.2@21.5,-41.6 v1@23.5,-41.6 ; v1(23.475,-41.875) 23.5,-41.9 24.2,-41.9 ; v1@24.3,-41.9 v1(24.5,-42.1) ; 24.3,-41.8 24.2,-41.9 ; v2(27.5,-41.4) 27.4,-41.5 26.252,-41.5 25.852,-41.9 v1(25.5,-41.9) 24.2,-41.9 ; R29.2@27.7,-46.562 28.279,-45.983 29.392,-45.983 C36.1@29.5,-45.875 ; v2(51.65,70.075) Y3.2@51.775,70.075 ; J4.2@52.5,-46.6 58,-52.1 S1.2@65.7,-52.1 ; Y3.4@53.95,68.325 v2(53.977,68.298) 53.977,66.589 C31.1@54.004,66.562 54.545,67.104 C30.1@55.838,67.104 ; C16.1@57.838,70.804 57.838,72.538 v1(57.9,72.6) C27.1@59.2,72.6 ; C26.1@67.062,72.7 68.766,72.7 C19.1@68.904,72.562
  Top Layer w1: J2.6@16.22,17 16.22,16.9 15.738,16.417 C14.1@15.738,14.404 v1(15.738,7.062) v1(18.3,4.5) D1.2@20.2,4.5 ; C12.1@20.496,-20.662 20.504,-20.654 21.746,-20.654 22.4,-20 22.4,-18.766 C13.1@22.396,-18.762 ; R26.2@26.138,-49.6 24.108,-47.57 24.108,-46.57 v2(24.1,-46.562) R30.2@25.9,-46.562 R29.2@27.7,-46.562 ; v2(27.5,-41.4) 27.525,-41.375 27.53,-41.37 30.088,-41.37 C35.1@30.096,-41.362 C38.1@31.896,-41.362 C33.1@33.696,-41.362 ; U2.19@27.55,-6.35 32.8,-11.6 U2.9@32.8,-14.96 ; R25.1@32.87,-49.592 33.525,-49.592 33.892,-49.225 C32.1@35.9,-49.225 37.875,-49.225 38.5,-48.6 39.25,-47.85 v1(40.719,-46.381) 41.7,-45.4 v1(42.025,-45.4) 42.925,-44.5 v1(43.05,-44.5) 43.05,-44.05 43.562,-43.538 R27.2@43.562,-41.2 43.562,-39.338 C34.1@43.525,-39.3 ; C40.1@42.262,-35.704 C41.1@42.262,-37.504 43.517,-38.758 ; C29.1@56.062,61.196 56.07,61.188 57.512,61.188 v2(57.65,61.05) 58.092,61.492 58.092,62.567 R37.1@58.1,62.575 C39.1@59.959,62.575 ; C39.1@59.996,62.538 60.004,62.53 60.57,62.53 60.6,62.5 ; C28.1@60.038,60.804 C39.1@60.038,62.496 ; v1(65.1,74.7) 65.1,75.1 ; C9.1@75.062,34.396 75.066,34.4 76.834,34.4 C8.1@76.838,34.404 ; C1.1@75.762,23.396 C2.1@75.762,25.196
  other v1: 53.625,-52.425 57.675,-52.25 61.2,-52.15 58.625,-50.475 53.55,-50.45 62.125,-50.325 34.4,-49.2 37.5,-49.2 38.6,-48.7 39.4,-48 33.075,-47.55 40.5,-47.5 42.069,-46.664 43.7,-45.7 44.3,-44.6 45.7,-44.5 32.3,-43.7 45.3,-43.5 46.7,-43.5 33.2,-43.4 44.2,-43.4 31.5,-42.8 47.95,-42.8 32.525,-42.675 45.7,-42.2 49.15,-42.125 47,-41.914 48.35,-41.3 50,-41.3 45.4,-41 23.45,-40.75 25.575,-40.75 24.5,-40.7 46.5,-40.4 47.725,-40.375 49.001,-40.008 50.696,-39.843 45.2,-39.6 46.6,-39.066 48.275,-39 49.943,-38.854 45.025,-38.35 46.91,-37.71 48.3,-37.6 45.595,-37.05 44.275,-36.55 48.75,-35.875 50.15,-35.85 46.15,-35.725 15.6,-23.2 18.2,-23.2 16.9,-23.1 15.6,-22 18.1,-22 15.6,-20.9 16.8,-20.9 18,-20.9 17.7,6.9 16.6,7.8 17.9,8.8 16.6,9.1 17.9,10.1 16.6,10.2 27.2,23.2 77.2,23.5 80.2,23.5 78.7,23.525 77.2,25.1 78.675,25.1 80.2,25.1 75.1,35.9 76.6,35.9 75.1,37.1 76.6,37.1 75.1,38.4 76.6,38.4 31.6,56.4 33.4,56.4 31.6,57.8 33.4,57.8
  other v2: 36.8,-41.9 26.1,-10.6 27.8,-10.6 26.1,-9.1 27.8,-9.1 26.1,-7.6 27.8,-7.6 26.3,-2.7 28,-2.7 26.3,-1.4 28,-1.4 63.525,15.7 52.975,22 58,25.5 59.3,25.5 60.8,25.5 62.05,25.5 58,26.7 59.3,26.7 60.8,26.7 62.05,26.7 58,27.9 59.3,27.9 60.8,27.9 62.1,27.9 58,29.1 59.3,29.1 60.8,29.1 62.1,29.1 64.2,64.975 66.1,65 72.062,65.296 65.05,66.025 63.1,66.125 53.99,66.576 66.075,66.925 55.85,67.075 64.9,68.025 74.662,68.896 68,72.7
  other v3: 32.7,11.6
IO9: Q2.3 U2.8 | length 29.5
  Top Layer w0.8: v1(26.1,6.8) Q2.3@26.1,8.684
  Top Layer w0.9: v1(31.3,-16.8) U2.8@31.3,-14.96
  Bottom Layer w0.9: v1(26.1,6.8) 31.3,1.6 v1(31.3,-16.8)
NetA1_1: A1.1 R20.1 | length 2.1
  Top Layer w0.8: R20.1@73.8,78.1 75.2,79.5 A1.1@75.2,79.6
NetA1_3: A1.3 R22.1 | length 2.1
  Top Layer w0.8: A1.3@55,79.6 55,79.5 55.098,79.402 55.098,79.339 R22.1@56.338,78.1
NetBT1_+: BT1.1 F1.1 | length 3
  Top Layer w1: BT1.1@21.5,-39.06 22.56,-38 F1.1@24.075,-38
NetBZ1_2: BZ1.2 C37.1 L4.1 R33.2 | length 28.5
  Top Layer w1: L4.1@22.85,63.2 22.762,63.288 C37.1@22.762,68.196 24.5,69.934 BZ1.2@24.5,75.8 26.3,75.8 28,74.1 R33.2@28,63.162
NetC3_2: C3.2 R2.1 U1.24 | length 12.9
  Top Layer w0.25: C3.2@56.604,32.238 57.25,31.591 U1.24@57.25,30.53
  Top Layer w0.4: R2.1@53.8,25.762 53.458,26.104 53.096,26.104 52.3,26.9 52.3,31 53.538,32.238 C3.2@56.604,32.238
NetC4_2: C4.2 R1.1 R2.2 U1.36 | length 7.1
  Top Layer w0.25: R2.2@53.8,23.838 55.758,23.838 56.27,24.35 U1.36@56.57,24.35 ; C4.2@54.9,22 C4.2@54.95,22.05
  Top Layer w0.6: R2.2@53.8,23.838 53.888,23.75 53.888,23.012 C4.2@54.9,22
  Top Layer w0.8: R1.1@54.9,20.2 C4.2@54.9,22
NetC5_2: C5.2 R39.1 U1.48 | length 5.2
  Top Layer w0.25: U1.48@62.75,23.67 62.75,23.37 62.76,23.36 62.825,23.36 63.196,22.989 C5.2@63.196,22.062
  Top Layer w0.3: R39.1@61.6,19.362 61.6,20.366 62.454,21.22 C5.2@63.296,22.062
NetC6_2: C6.2 R38.1 U1.9 | length 4.7
  Top Layer w0.15: U1.9@63.43,28.35 64.095,28.35 64.27,28.175 65.416,28.175 C6.2@65.938,28.696
  Top Layer w0.9: R38.1@65.9,30.538 65.919,30.519 65.919,28.715 C6.2@65.938,28.696
NetC12_2: C12.2 R11.1 U2.1 | length 3.9
  Top Layer w0.9: R11.1@20.462,-16.9 20.8,-16.562 U2.1@20.8,-14.96
  Top Layer w1: C12.2@20.462,-18.696 R11.1@20.462,-16.9
NetC15_2: C15.2 R18.1 | length 1.8
  Top Layer w0.8: R18.1@54.538,74.4 54.588,74.35 54.588,72.646 C15.2@54.638,72.596
NetC18_2: C18.2 C26.2 C27.2 U3.5 U3.8 U3.39 | length 22.4
  Top Layer w0.2: C27.2@61.125,72.6 62.023,71.701 62.023,71.62 62.208,71.435 v1(62.208,71.3) 62.709,70.799 63.001,70.799 63.35,70.45 U3.8@63.35,69.45
  Top Layer w0.3: U3.5@64.85,69.45 64.85,71.042 65.1,71.292 v1(65.1,71.4) 65.1,72.342 65.08,72.362 64.8,72.362 C26.2@65.138,72.7 ; U3.39@67.55,68.25 69.425,68.25 70.075,68.9 72.641,68.9 C18.2@72.738,68.996 ; C18.2@72.734,68.9 C18.2@72.738,68.896
  Bottom Layer w0.2: v1(62.208,71.3) 62.258,71.35 65.05,71.35 v1(65.1,71.4)
  Bottom Layer w0.3: v1(65.1,71.4) 65.177,71.323 65.177,71.163 67.755,68.585 v1(69.747,68.585)
NetC19_2: C19.2 C28.2 R19.1 U3.23 U3.40 | length 29.2
  Top Layer w0.3: C28.2@61.9,60.741 62,60.841 62,61.5 63.35,62.85 U3.23@63.35,63.55 ; U3.40@67.55,68.75 67.8,68.75 68.546,69.496 68.546,70.28 C19.2@68.904,70.638
  Top Layer w0.5: R19.1@70.638,70.8 70.669,70.831 70.669,72.069 v1(70.7,72.1)
  Top Layer w0.8: C28.2@61.901,60.741 61.947,60.696 v1(61.947,59.446) ; C19.2@68.904,70.638 70.475,70.638 R19.1@70.638,70.8
  Bottom Layer w0.3: v1(61.947,59.446) 62,59.5 66,59.5 70.9,64.4 70.9,68.439 70.7,68.639 v1(70.7,72.1)
NetC20_1: C20.1 C22.2 R20.2 | length 3.5
  Top Layer w0.8: C22.2@70.1,78.104 70.102,78.102 71.873,78.102 R20.2@71.875,78.1 71.858,78.083 71.858,76.379 C20.1@71.841,76.362
NetC20_2: C20.2 C21.2 L1.2 | length 5.1
  Top Layer w0.8: C21.2@70,76.304 69.038,75.341 69.038,74.538 L1.2@69,74.5 69.031,74.469 71.81,74.469 C20.2@71.841,74.438
NetC23_1: C23.1 C25.2 L2.2 R18.2 | length 7.1
  Top Layer w0.8: R18.2@56.462,74.4 56.481,74.419 58.285,74.419 C25.2@58.304,74.438 58.335,74.469 61.206,74.469 L2.2@61.238,74.5 61.13,74.608 61.13,75.27 C23.1@60.1,76.3
NetC24_1: C24.1 C25.1 R22.2 | length 3.5
  Top Layer w0.8: C25.1@58.304,76.362 58.283,76.383 58.283,78.079 R22.2@58.262,78.1 58.264,78.102 60.036,78.102 C24.1@60.038,78.104
NetC30_2: C30.2 U3.14 Y3.1 | length 9.3
  Top Layer w0.15: Y3.1@53.95,70.075 54.791,70.075 C30.2@57.762,67.104 58.542,67.104 58.92,66.725 60.53,66.725 61.055,67.25 U3.14@61.65,67.25
NetC31_2: C31.2 U3.15 Y3.3 | length 13.9
  Top Layer w0.15: C31.2@54.004,64.638 55.251,65.885 58.585,65.885 59,66.3 60.486,66.3 60.886,66.7 61.6,66.7 U3.15@61.65,66.75
  Top Layer w0.5: Y3.3@51.65,68.325 51.65,65.75 52.762,64.638 C31.2@54.004,64.638
NetC32_2: C32.2 U4.1 U4.12 U4.13 | length 15.4
  Top Layer w0.2: U4.13@35.4,-41.1 35,-41.1 34.7,-41.4 34.7,-46.1 C32.2@35.9,-47.3 36.8,-47.3 38.8,-45.3 38.8,-42.8 38.2,-42.2 U4.1@38.2,-41.6
  Top Layer w0.25: U4.13@35.4,-41.1 U4.12@35.4,-40.6
NetC42_2: C42.2 F1.2 R6.2 U5.2 | length 6.6
  Top Layer w0.3: C42.2@27.838,-37.604 28.1,-37.866 U5.2@28.1,-40.175
  Top Layer w0.8: F1.2@26,-38 F1.2@26.031,-38.031
  Top Layer w1: F1.2@26,-38 26.396,-37.604 C42.2@27.838,-37.604 27.838,-36.075 R6.2@27.562,-35.8
NetD1_1: D1.1 R35.1 | length 1.6
  Top Layer w0.9: D1.1@21.7,4.5 R35.1@23.275,4.5
NetD2_1: D2.1 U1.30 | length 33
  Top Layer w0.15: v1(54.375,27.825) 54.85,27.35 U1.30@56.57,27.35
  Top Layer w0.6: D2.1@36,9.75 36.05,9.75 36.506,10.206 37.056,10.206 v1(37.075,10.225)
  Bottom Layer w0.5: 40.9,20.854 40.9,20.9 40.9,21.7 46.7,27.5 51.2,27.5 51.873,28.173 53.429,28.173 53.739,27.863 54.337,27.863 v1(54.375,27.825)
  Bottom Layer w0.6: v1(37.075,10.225) 40.9,14.05 40.9,20.854
NetD2_3: D2.3 D3.3 R4.2 R14.1 | length 7.7
  Top Layer w0.6: R4.2@32.7,9.638 33.762,10.7 D2.3@34,10.7
  Top Layer w0.8: R4.2@32.7,9.638 34,8.338 D3.3@34,7.25 33.262,6.512 R14.1@33.262,4.5